# Altium PCB latch_sdc_pcbrouted.PcbDoc
Units mm, origin at the board's own origin, x right, y up, seen from the top; angles counter-clockwise.
Board outline 152.4 x 101.6 mm, 2 copper layers (Top Layer, Bottom Layer); 27 components, 21 nets, 82 pads, 16 vias.
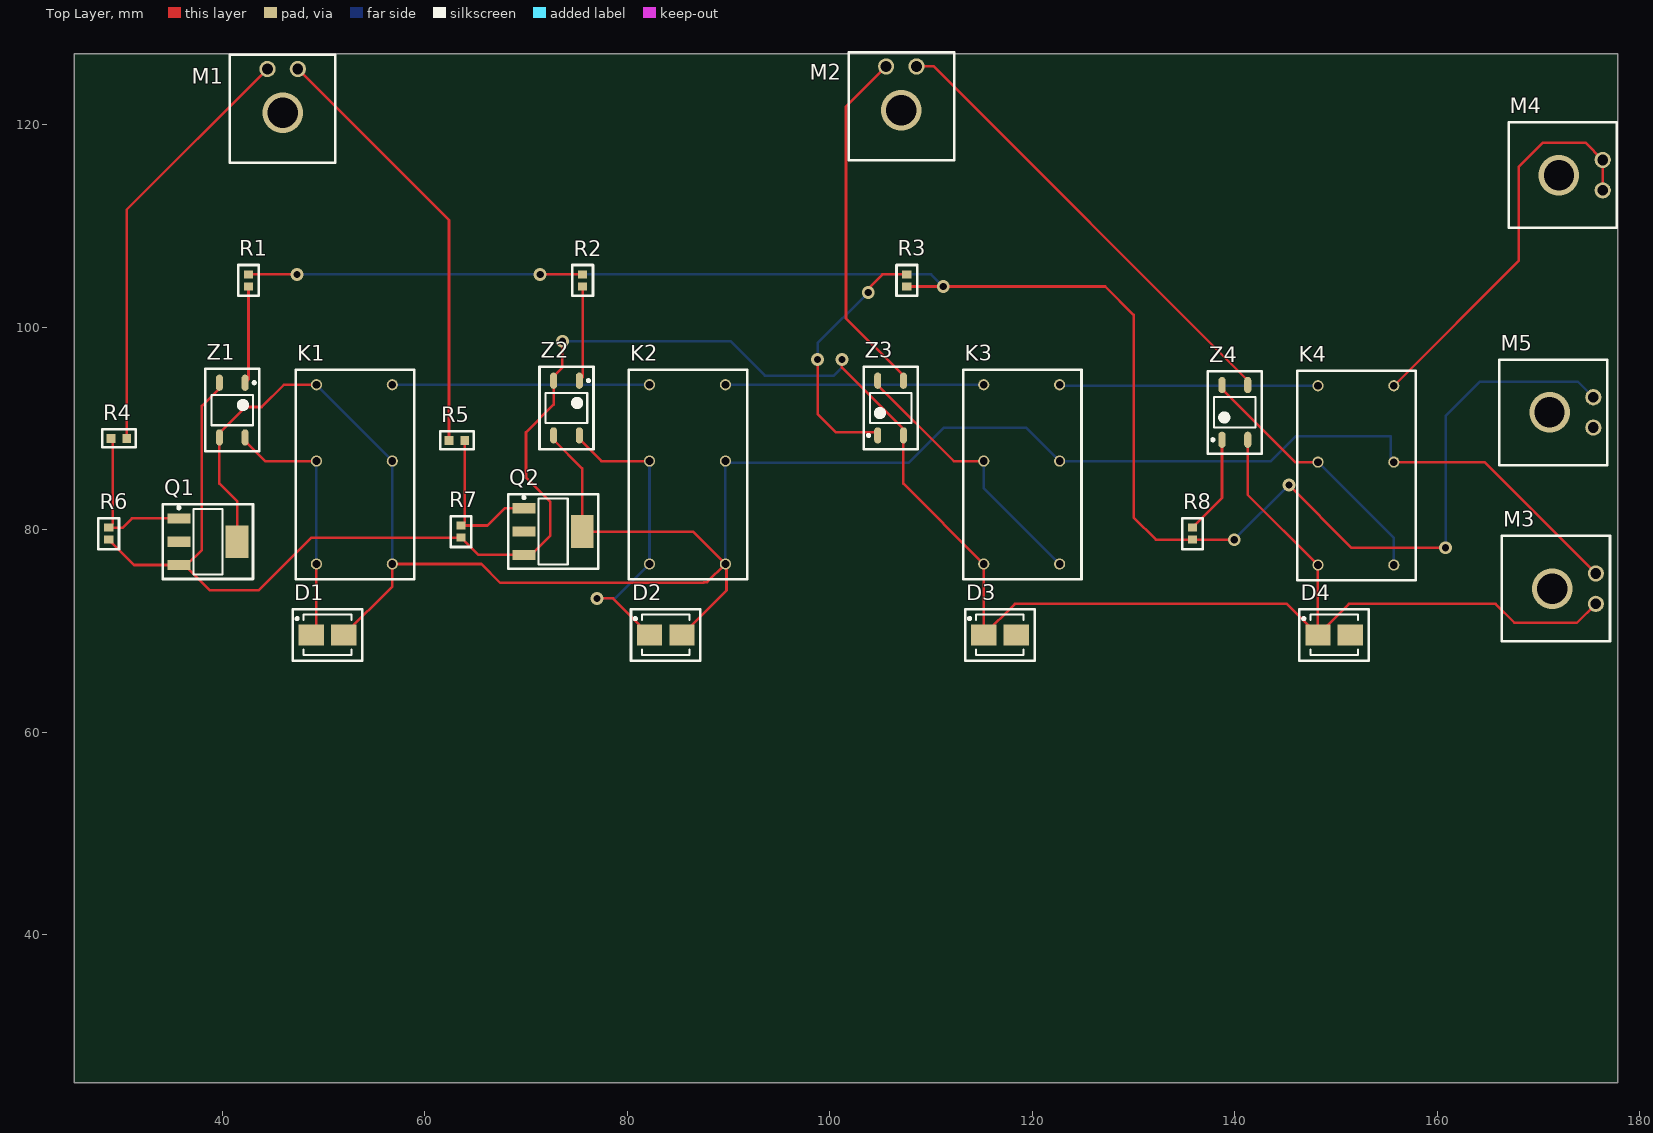
[diagram p0: Top Layer view]
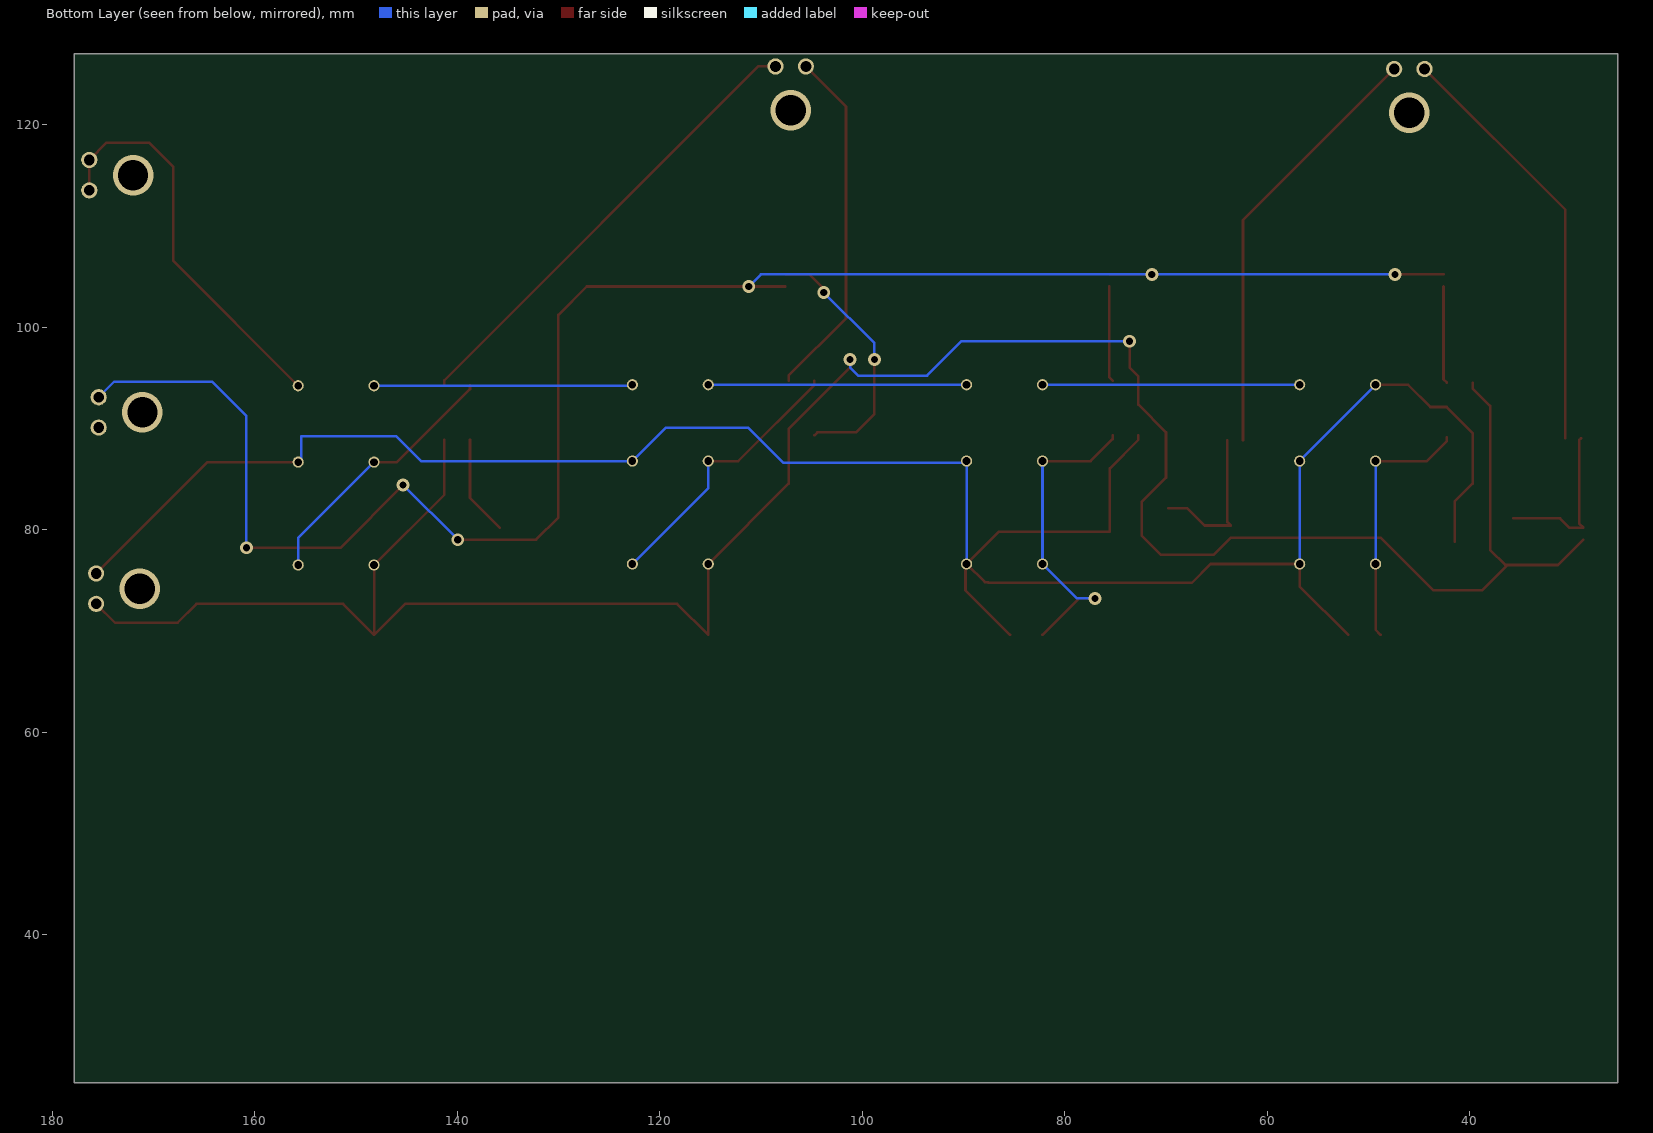
[diagram p1: Bottom Layer view, seen from below]

## Layer stack, top to bottom
Top Solder: solder mask 0.0102, Solder Resist, Dk 3.5
Top Layer: signal copper 0.0356
Dielectric 1: dielectric 0.32, FR-4, Dk 4.8
Bottom Layer: signal copper 0.0356
Bottom Solder: solder mask 0.0102, Solder Resist, Dk 3.5

## Board outline
25.4,25.4 177.8,25.4 177.8,127 25.4,127

## Design rules (kind name [scope] priority, off if disabled: settings)
Clearance [All] p1: gap=0.254 ignorepadtopadclearanceinfootprint=FALSE except(0: Arc-Hole Track-Hole SMDPad-Hole THPad-Hole Via-Hole Fill-Hole Poly-Hole Region-Hole Text-Hole)
PolygonConnect [All] p1: connectstyle=Relief reliefconductorwidth=0.254 reliefentries=4 polygonreliefangle="90 Angle" airgapwidth=0.254
RoutingVias [All] p1: holewidth=0.711 width=1.27 viastyle="Through Hole" minholewidth=0.711 minwidth=1.27 maxholewidth=0.711 maxwidth=1.27
SolderMaskExpansion [All] p1: expansion=0.102
Width [All] p1: maxlimit=0.254 minlimit=0.254 preferedwidth=0.254
30 further rules are at their usual default settings.

## Components (designator, comment, footprint, x,y, rotation, side; value= is the part's Value field where it differs from the comment)
D1 "Diode" DIOM4436X26N 50.4,69.6 r0 top
D2 "Diode" DIOM4436X26N 83.8,69.6 r0 top
D3 "Diode" DIOM4436X26N 116.8,69.6 r0 top
D4 "Diode" DIOM4436X26N 149.8,69.6 r0 top
K1 "Power Relay" RELAY_FOOTPRINT 56.8,76.6 r90 top
K2 "Power Relay" RELAY_FOOTPRINT 89.693,76.6 r90 top
K3 "Power Relay" RELAY_FOOTPRINT 122.693,76.6 r90 top
K4 "Power Relay" RELAY_FOOTPRINT 155.693,76.5 r90 top
M1 "MOLEX" "MOLEX 1" 45.974,121.158 r0 top
M2 "MOLEX" "MOLEX 1" 107.061,121.412 r0 top
M3 "MOLEX" "MOLEX 1" 171.323,74.168 r270 top
M4 "MOLEX" "MOLEX 1" 172,115 r270 top
M5 "MOLEX" "MOLEX 1" 171.069,91.567 r270 top
Q1 "STN1NK60Z" SOT230P700X180-4N 38.6,78.8 r0 top
Q2 "STN1NK60Z" SOT230P700X180-4N 72.675,79.8 r0 top
R1 "10K" 10KOHM 42.6,104.6 r90 top
R2 "10K" 10KOHM 75.6,104.6 r90 top
R3 "10K" 10KOHM 107.6,104.6 r270 top
R4 "100" 100OHM 29.8,89 r0 top
R5 "100" 100OHM 63.175,88.8 r180 top
R6 "10K" 10KOHM 28.8,79.6 r90 top
R7 "10K" 10KOHM 63.6,79.8 r90 top
R8 "10K" 10KOHM 135.8,79.6 r270 top
Z1 "SOP Relay" TSOP254P610X114-4N 41,91.8 r270 top
Z2 "SOP Relay" TSOP254P610X114-4N 74,92 r270 top
Z3 "SOP Relay" TSOP254P610X114-4N 106,92 r90 top
Z4 "SOP Relay" TSOP254P610X114-4N 140,91.567 r90 top

## Footprints (in the part's own frame and the unit in brackets; to place one, negate y for a bottom-side part, rotate by r counter-clockwise, add the part's x,y. Pads: shape width x height; smd on the part's side, far side on the other; paste and mask are expansions set on the pad)
10KOHM [mm] "Chip Resistor, 2-Leads, Body 1.50x0.80mm, IPC Medium Density"
  rect 0.8x0.9 smd: 1(-0.6,0) 2(0.6,0)
  silkscreen extent -1.52,-1.02 1.52,1.02, body extent -0.8,-0.45 0.8,0.45, height 0.5
100OHM [mm] "Chip Resistor, 2-Leads, Body 1.60x0.80mm, IPC Medium Density"
  rect 0.85x0.9 smd: 1(-0.775,0) 2(0.775,0)
  silkscreen extent -1.65,-0.89 1.65,0.89, body extent -0.85,-0.45 0.85,0.45, height 0.55
DIOM4436X26N [mm] "Molded Diode, 2-Leads, Body 4.38x3.62mm, IPC Medium Density"
  rect 2.5x2.1 smd: 1(-1.6,0) 2(1.6,0)
  silkscreen extent -3.43,-2.54 3.43,2.54, body extent -2.35,-1.97 2.35,1.97, height 2.6
"MOLEX 1" [mm]
  round 1.6 hole 1.06: 1(-1.5,4.32) 2(1.5,4.32)
  silkscreen extent -5.21,-4.95 5.21,5.71, body extent -4.82,-4.57 4.83,5.33, height 6.13
RELAY_FOOTPRINT [mm]
  round 1.1 hole 0.762: 1(0,7.493) 3(10.16,7.493) 4(17.7,7.493) 5(17.7,0) 6(10.16,0) 8(0,0)
  silkscreen extent -1.52,-2.16 19.18,9.53, body extent -1.11,-1.78 18.89,9.22, height 11
SOT230P700X180-4N [mm] "SOT223, 4-Leads, Body 6.40x7.00mm (avg), Pitch 2.30mm, IPC Medium Density"
  rect 2.25x1 smd: 1(-2.875,2.3) 2(-2.875,0) 3(-2.875,-2.3)
  rect 2.25x3.25 smd: 4(2.875,0)
  silkscreen extent -4.44,-3.68 4.44,3.68, body extent -1.75,-3.25 1.75,3.25, height 1.8
TSOP254P610X114-4N [mm] "TSOP, 4-Leads, Body 4.09x3.81mm, Pitch 2.54mm, IPC Medium Density"
  oval 1.6x0.7 smd: 1(-2.7,1.27) 2(-2.7,-1.27) 3(2.7,-1.27) 4(2.7,1.27)
  silkscreen extent -4.06,-2.67 4.06,2.67, body extent -1.9,-2.05 1.9,2.05, height 1.14

## Part data
D1 D2 D3 D4: library part SD560BTR, "DIODE GEN PURP 600V 5A SMB", Average Rectified Current=5A, Case/Package=SMB, Manufacturer=SMC, Max Reverse Voltage (DC)=600V, Supplier Part Number 1=1655-1530-1-ND, Manufacturer Part Number=SD560BTR, Mount="Surface Mount", Packaging="Tape and Reel", Pricing 1="1=0.5, 10=0.358, 100=0.2106, 500=0.11922, 1000=0.0914 (USD)", Stock 1=109105, Supplier 1=Digi-Key
K1 K2 K3 K4: library part G6B2214PUSDC12, "RELAY GEN PURPOSE DPST 5A 12V", Case/Package=DIP, Coil Current=25mA, Coil Power=300mW, Coil Resistance=480R, Coil Voltage (DC)=12V, Contact Current Rating=5A, Manufacturer=Omron, Max Operating Temperature=70°C, Max Voltage Rating (AC)=380V, Max Voltage Rating (DC)=125V, Min Operating Temperature=-25°C, Package Quantity=100, Supplier Part Number 1=13AC8848, Approvals=UL,CSA, Coil Type=Non-Latching, ComponentLink1Description=http://www.mouser.com/ds/2/307/en-g6b-230838.pdf?src-supplier=Mouser, ComponentLink1URL=http://www.mouser.com/ds/2/307/en-g6b-230838.pdf?src-supplier=Mouser, ComponentLink2Description=https://www.verical.com/server-webapp/html/getDatasheet?partID=485879&src-supplier=Verical, ComponentLink2URL=https://www.verical.com/server-webapp/html/getDatasheet?partID=485879&src-supplier=Verical, ComponentLink3Description=https://omronfs.omron.com/en_US/ecb/products/pdf/en-g6b.pdf?src-supplier=Digi-Key, ComponentLink3URL=https://omronfs.omron.com/en_US/ecb/products/pdf/en-g6b.pdf?src-supplier=Digi-Key, Contact Material=Silver,Cadmium, Current Rating=5A, Depth=11mm, Length=20mm, Manufacturer Part Number=G6B2214PUSDC12, Max Current Rating=5A, Mount="Through Hole,PCB", Number of Pins=6, Operate Time=10ms, Packaging=Bulk, Pricing 1="1=5.58, 5=5.37, 10=5.17, 25=4.96, 50=4.8, 100=4.64, 250=4.47 (USD)", Radiation Hardening=No, Relay Type="General Purpose", Release Time=10ms, Stock 1=0, Supplier 1=Newark, Termination="PC Pin", Throw Configuration=DPST, Voltage Rating (AC)=380V, Voltage Rating (DC)=125V, Weight=4.5g
M1 M2 M3 M4 M5: library part 43650-0200, "MOLEX - 43650-0200 - CONNECTOR, HEADER, 2POS, 1ROW, 3MM", Color=Black, Contact Resistance=10mR, Current Rating=5A, Flammability Rating="UL94 V-0", Insulation Resistance=1GR, Manufacturer=Molex, Max Operating Temperature=105°C, Min Operating Temperature=-40°C, Package Quantity=3927, Supplier Part Number 1=0436500200, Voltage Rating=600V, Voltage Rating (AC)=250V, ComponentLink1Description=http://www.molex.com/webdocs/datasheets/pdf/en-us/0436500200_PCB_HEADERS.pdf?src-supplier=Avnet, ComponentLink1URL=http://www.molex.com/webdocs/datasheets/pdf/en-us/0436500200_PCB_HEADERS.pdf?src-supplier=Avnet, ComponentLink2Description=http://www.onlinecomponents.com/productFiles/mf-MOL/1029720436500200_pcb_headers.pdf?src-supplier=Onlinecomponents.com, ComponentLink2URL=http://www.onlinecomponents.com/productFiles/mf-MOL/1029720436500200_pcb_headers.pdf?src-supplier=Onlinecomponents.com, ComponentLink3Description=http://www.farnell.com/datasheets/1933359.pdf?src-supplier=Element14, ComponentLink3URL=http://www.farnell.com/datasheets/1933359.pdf?src-supplier=Element14, ComponentLink4Description=https://www.distrelec.biz/Web/Downloads/20/66/04402066.pdf?mime=application%2Fpdf&src-supplier=Distrelec, ComponentLink4URL=https://www.distrelec.biz/Web/Downloads/20/66/04402066.pdf?mime=application%2Fpdf&src-supplier=Distrelec, ComponentLink5Description=http://www.jameco.com/Jameco/Products/ProdDS/884053.pdf?src-supplier=Jameco, ComponentLink5URL=http://www.jameco.com/Jameco/Products/ProdDS/884053.pdf?src-supplier=Jameco, ComponentLink6Description=http://www.mouser.com/ds/2/276/0436500200_PCB_HEADERS-148844.pdf?src-supplier=Mouser, ComponentLink6URL=http://www.mouser.com/ds/2/276/0436500200_PCB_HEADERS-148844.pdf?src-supplier=Mouser, ComponentLink7Description=http://uk.rs-online.com/webdocs/13c3/0900766b813c3b7d.pdf?src-supplier=RSComponents, ComponentLink7URL=http://uk.rs-online.com/webdocs/13c3/0900766b813c3b7d.pdf?src-supplier=RSComponents, ComponentLink8Description=http://www.molex.com/webdocs/datasheets/pdf/en-us/0436500200_PCB_HEADERS.pdf?src-supplier=Avnet+Europe, ComponentLink8URL=http://www.molex.com/webdocs/datasheets/pdf/en-us/0436500200_PCB_HEADERS.pdf?src-supplier=Avnet+Europe, ComponentLink9Description=http://www.farnell.com/datasheets/1709823.pdf?src-supplier=Element14, ComponentLink9URL=http://www.farnell.com/datasheets/1709823.pdf?src-supplier=Element14, Connector Type=Plug,Socket, Contact Material=Brass,Tin, Contact Plating=Tin, Depth=9.9mm, Gender=Male, Glow Wire Compliant=Compliant, Halogen Free="Low Halogen", Height=5.57mm, Housing Color=Black, Housing Material=Thermoplastic, Lead Free="Lead Free", Length=9.65mm, Manufacturer Part Number=43650-0200, Mount="Through Hole", Number of Circuits=2, Number of Contacts=2, Number of Positions=2, Number of Rows=1, Orientation="Right Angle", Packaging=Tray, Pitch=3mm, Pricing 1="1=0.39494, 10=0.36394, 25=0.34123, 50=0.33065, 100=0.32119 (USD)", Radiation Hardening=No, REACH SVHC=Unknown, Stock 1=0, Supplier 1=Avnet, Termination=Solder, Voltage Rating (DC)=250V, Working Voltage=250V
Q1 Q2: "Trans MOSFET N-CH 600V 0.3A 4-Pin(3+Tab) SOT-223 T/R", Case/Package=SOT-223, Continuous Drain Current (ID)=300mA, Current Rating=250mA, Drain to Source Breakdown Voltage=600V, Drain to Source Resistance=15R, Gate to Source Voltage (Vgs)=30V, Input Capacitance=94pF, Manufacturer=STMicroelectronics, Max Operating Temperature=150°C, Max Power Dissipation=3.3W, Min Operating Temperature=-55°C, Package Quantity=4000, Supplier Part Number 1=STN1NK60Z-CUTT, Threshold Voltage=3.75V, ComponentLink1Description=http://www.farnell.com/datasheets/1868794.pdf?src-supplier=Element14, ComponentLink1URL=http://www.farnell.com/datasheets/1868794.pdf?src-supplier=Element14, ComponentLink2Description=http://www.st.com/web/en/resource/technical/document/datasheet/CD00003347.pdf?src-supplier=Future+Electronics, ComponentLink2URL=http://www.st.com/web/en/resource/technical/document/datasheet/CD00003347.pdf?src-supplier=Future+Electronics, ComponentLink3Description=http://www.mouser.com/ds/2/389/CD00003347-486150.pdf?src-supplier=Mouser, ComponentLink3URL=http://www.mouser.com/ds/2/389/CD00003347-486150.pdf?src-supplier=Mouser, ComponentLink4Description=https://www.verical.com/server-webapp/html/getDatasheet?partID=74454&src-supplier=Verical, ComponentLink4URL=https://www.verical.com/server-webapp/html/getDatasheet?partID=74454&src-supplier=Verical, Drain to Source Voltage (Vdss)=600V, Element Configuration=Single, Fall Time=18ns, Height=1.8mm, Lead Free="Lead Free", Length=6.5mm, Manufacturer Part Number=STN1NK60Z, Mount="Surface Mount", Number of Elements=1, Number of Pins=4, On-State Resistance=15R, Packaging="Tape and Reel", Power Dissipation=3.3W, Pricing 1="1=0.325, 100=0.27, 250=0.26, 500=0.255, 1500=0.245 (USD)", Radiation Hardening=No, Rds On Max=15R, REACH SVHC="No SVHC", Rise Time=5ns, Stock 1=1620, Supplier 1="Future Electronics", Turn-Off Delay Time=13ns, Turn-On Delay Time=5.5ns, Voltage Rating (DC)=600V, Weight=0.01lb, Width=3.5mm
R1 R2 R3 R6 R7 R8: library part RNCP0603FTD10K0, "RES 10K OHM 1% 1/8W 0603", Case/Package=0603, Case Code (Metric)=1608, Manufacturer="Stackpole Electronics", Max Operating Temperature=155°C, Max Power Dissipation=125mW, Min Operating Temperature=-55°C, Resistance=10kR, Supplier Part Number 1=RNCP0603FTD10K0DKR-ND, Temperature Coefficient=100ppm/°C, Tolerance=1%, Case Code (Imperial)=0603, Composition="Thin Film", Contact Plating=Tin,Matte, Features="Moisture Resistant,Anti-Sulfur", Height=0.02inch, Lead Free="Lead Free", Length=0.059inch, Manufacturer Part Number=RNCP0603FTD10K0, Mount="Surface Mount", Number of Terminations=2, Packaging="Tape and Reel", Pricing 1="1=0.1, 10=0.067, 100=0.0273, 1000=0.01224, 2500=0.01063 (USD)", Radiation Hardening=No, Stock 1=85524, Supplier 1=Digi-Key, Width=0.031inch
R4 R5: library part RT0603DRD07100RL, "RES SMD 100 OHM 0.5% 1/10W 0603", Case/Package=0603, Case Code (Metric)=1608, Manufacturer=Yageo, Max Operating Temperature=155°C, Max Power Dissipation=100mW, Min Operating Temperature=-55°C, Package Quantity=1, Resistance=100R, Temperature Coefficient=25ppm/°C, Tolerance=0.5%, Voltage Rating (DC)=50V, Case Code (Imperial)=0603, Composition="Thin Film", Depth=0.8mm, Features="Moisture Resistant", Height=0.022inch, Lead Free="Lead Free", Length=0.063inch, Manufacturer Part Number=RT0603DRD07100RL, Military Standard=Not, Number of Terminations=2, Packaging="Tape and Reel", Power Rating=100mW, Pricing 1="1=0.19, 10=0.1159, 25=0.1043, 100=0.038, 250=0.0342, 500=0.0308, 1000=0.0225 (USD)", Stock 1=1979, Supplier 1=Arrow, Supplier Part Number 1=RT0603DRD07100RL, Width=0.031inch
Z1 Z2 Z3 Z4: library part CPC1014NTR, "SSR RELAY SPST-NO 400MA 0-60V", Case/Package=SOP, Input Current=50mA, Isolation Voltage=1.5kV, Load Current=400mA, Manufacturer="Ixys Clare", Max Operating Temperature=85°C, Max Output Voltage=60V, Min Operating Temperature=-40°C, On-State Resistance=2R, Package Quantity=1, Supplier Part Number 1=CLA314DKR-ND, ComponentLink1Description=http://www.clare.com/home/pdfs.nsf/www/CPC1014N.pdf/$file/CPC1014N.pdf?src-supplier=Future+Electronics, ComponentLink1URL=http://www.clare.com/home/pdfs.nsf/www/CPC1014N.pdf/$file/CPC1014N.pdf?src-supplier=Future+Electronics, ComponentLink2Description=http://www.ixysic.com/home/pdfs.nsf/www/CPC1014N.pdf/$file/CPC1014N.pdf?src-supplier=Digi-Key, ComponentLink2URL=http://www.ixysic.com/home/pdfs.nsf/www/CPC1014N.pdf/$file/CPC1014N.pdf?src-supplier=Digi-Key, Height=2.184mm, Lead Free="Lead Free", Length=4.089mm, Manufacturer Part Number=CPC1014NTR, Max Input Current=50mA, Max Output Current=400mA, Mount="Surface Mount", Number of Pins=4, Output Current=400mA, Packaging="Tape and Reel", Pricing 1="1=1.77, 10=1.602, 25=1.43, 100=1.287, 250=1.144, 500=1.001, 1000=0.8294 (USD)", Radiation Hardening=No, Relay Type=Relay, Stock 1=94881, Supplier 1=Digi-Key, Termination="Gull Wing", Throw Configuration=SPST, Width=3.8mm

## Via types
v1: diameter 1.27, hole 0.711, Top Layer to Bottom Layer, 11 vias
v2: diameter 4, hole 3, Top Layer to Bottom Layer, 5 vias

## Nets (pads, with @x,y where several pads share a name; then routed paths per layer and width w, separated by ;. In a path a pad name is that pad's centre, name@x,y a point inside that pad or via, vN(x,y) a via of type N, cw(c..) or ccw(c..) an arc to the next point about the centre after c; other vN are vias at no path point)
12v: D1.2 D2.2 K1.4 K1.6 K1.8 K2.6 K2.8 K3.6 K4.6 M3.1 Q1.4 Q2.4 Z1.3 Z2.3 | length 229.1
  Top Layer w0.254: Q1.4 41.475,82.8 39.73,84.545 Z1.3 39.73,89.53 42.3,92.1 43.9,92.1 46.1,94.3 K1.4 ; D1.2 56.8,74.4 K1.8 65.6,76.6 67.45,74.75 87.55,74.75 87.6,74.8 87.893,74.8 K2.8 ; Z2.3 72.73,88.87 75.55,86.05 Q2.4 86.493,79.8 K2.8 ; D2.2 89.8,74 89.8,76.493 K2.8 ; K4.6 164.651,86.66 M3.1
  Bottom Layer w0.254: K1.4 49.307,94.253 K1.6 K1.8 ; K2.8 K2.6 89.853,86.6 107.8,86.6 111.267,90.067 119.386,90.067 K3.6 143.56,86.76 146,89.2 155.4,89.2 155.4,86.953 K4.6
AIRs: K4.5 M4.1 M4.2 | length 39.7
  Top Layer w0.254: K4.5 168.019,106.526 168.019,115.8 170.419,118.2 174.62,118.2 M4.1 M4.2
"Fault 1": M1.1 R4.2 | length 42.2
  Top Layer w0.254: R4.2 30.575,111.579 M1.1
"Fault 2": M1.2 R5.2 | length 42.9
  Top Layer w0.254: M1.2 62.4,110.552 R5.2
"Fault 3": M2.1 Z3.3 | length 35
  Top Layer w0.254: M2.1 101.6,121.771 101.6,100.861 107.27,95.191 Z3.3
"Fault 4": M2.2 Z4.3 | length 46
  Top Layer w0.254: M2.2 110.268,125.732 141.27,94.73 Z4.3
GND: D3.1 D4.1 K3.1 K4.1 M3.2 Q1.3 Q2.3 R6.1 R7.1 Z1.2 Z2.2 Z3.2 Z4.2 | length 241.6
  Top Layer w0.254: R6.1 31.3,76.5 Q1.3 Q1.3@36.3,76.5 ; Z1.2 39.73,93.93 38,92.2 38,78 36.5,76.5 Q1.3@36.3,76.5 ; v1(73.6,98.6) 73.6,96 72.73,95.13 Z2.2 72.73,92.33 70,89.6 70,85.13 72.4,82.73 72.4,79.4 70.5,77.5 Q2.3 65.3,77.5 R7.1 48.8,79.2 43.6,74 38.8,74 Q1.3@36.3,76.5 ; v1(101.2,96.8) 101.2,96 107.27,89.93 Z3.2 107.27,84.53 K3.1 D3.1 118.268,72.668 145.132,72.668 D4.1 ; Z4.2 141.27,83.43 K4.1 D4.1 ; M3.2 173.775,70.8 167.6,70.8 165.732,72.668 151.268,72.668 D4.1
  Bottom Layer w0.254: v1(73.6,98.6) 90.2,98.6 93.6,95.2 100.4,95.2 101.2,96 v1(101.2,96.8)
NetD1_1: D1.1 K1.1 K1.3 Z1.4 | length 25.6
  Top Layer w0.254: Z1.4 42.27,88.73 44.24,86.76 K1.3 ; D1.1 49.307,70.107 K1.1
  Bottom Layer w0.254: K1.1 K1.3
NetD2_1: D2.1 K2.1 K2.3 Z2.4 | length 31.7
  Top Layer w0.254: Z2.4 75.27,88.93 77.44,86.76 K2.3 ; v1(77,73.2) 78.6,73.2 D2.1
  Bottom Layer w0.254: v1(77,73.2) 78.8,73.2 K2.1 K2.3
NetK1_5: K1.5 K2.4 | length 25.4
  Bottom Layer w0.254: K1.5 K2.4
NetK2_5: K2.5 K3.4 | length 25.5
  Bottom Layer w0.254: K2.5 K3.4
NetK3_3: K3.3 K3.8 Z3.4 | length 27.3
  Top Layer w0.254: Z3.4 104.73,94.27 112.24,86.76 K3.3
  Bottom Layer w0.254: K3.3 115.2,84.093 K3.8
NetK3_5: K3.5 K4.4 | length 25.5
  Bottom Layer w0.254: K3.5 122.793,94.2 K4.4
NetK4_3: K4.3 K4.8 Z4.4 | length 26.1
  Top Layer w0.254: Z4.4 138.73,93.87 145.94,86.66 K4.3
  Bottom Layer w0.254: K4.3 155.693,79.167 K4.8
NetQ1_1: Q1.1 R4.1 R6.2 | length 16.3
  Top Layer w0.254: R4.1 29.2,88.825 29.2,80.6 R6.2 30.2,80.2 31.1,81.1 Q1.1
NetQ2_1: Q2.1 R5.1 R7.2 | length 15.4
  Top Layer w0.254: R5.1 63.95,80.75 R7.2 66.2,80.4 67.9,82.1 Q2.1
NetR1_1: R1.1 Z1.1 | length 9.6
  Top Layer w0.254: Z1.1 42.6,94.83 R1.1
NetR2_1: R2.1 Z2.1 | length 9.4
  Top Layer w0.254: Z2.1 75.6,95.03 R2.1
NetR3_1: R3.1 Z3.1 | length 25.3
  Top Layer w0.254: v1(98.8,96.8) 98.8,91.4 100.6,89.6 104.43,89.6 Z3.1 ; v1@103.8,103.8 105.2,105.2 R3.1
  Bottom Layer w0.254: v1(98.8,96.8) 98.8,98.4 v1(103.8,103.4)
NetR8_1: R8.1 Z4.1 | length 9.9
  Top Layer w0.254: R8.1 138.73,83.13 Z4.1
SET/RESET: M5.1 R1.2 R2.2 R3.2 R8.2 | length 182.8
  Top Layer w0.254: R1.2 v1@47.2,105.2 ; v1(71.4,105.2) R2.2 ; R3.2 v1(111.2,104) 127.2,104 130,101.2 130,81.2 132.2,79 R8.2 v1(139.932,79) ; v1(145.332,84.4) 151.532,78.2 v1(160.8,78.2)
  Bottom Layer w0.254: v1(47.4,105.2) v1(71.4,105.2) 110,105.2 v1(111.2,104) ; v1(139.932,79) v1(145.332,84.4) ; v1(160.8,78.2) 160.8,91.2 164.2,94.6 173.856,94.6 M5.1
pads on no net: D3.2 D4.2 M5.2 Q1.2 Q2.2
copper on no net:
  other v2: 171.323,74.168 171.069,91.567 172,115 45.974,121.158 107.061,121.412